# EAGLE board STM32F013C8T6-PCB (EAGLE 7.5.0)
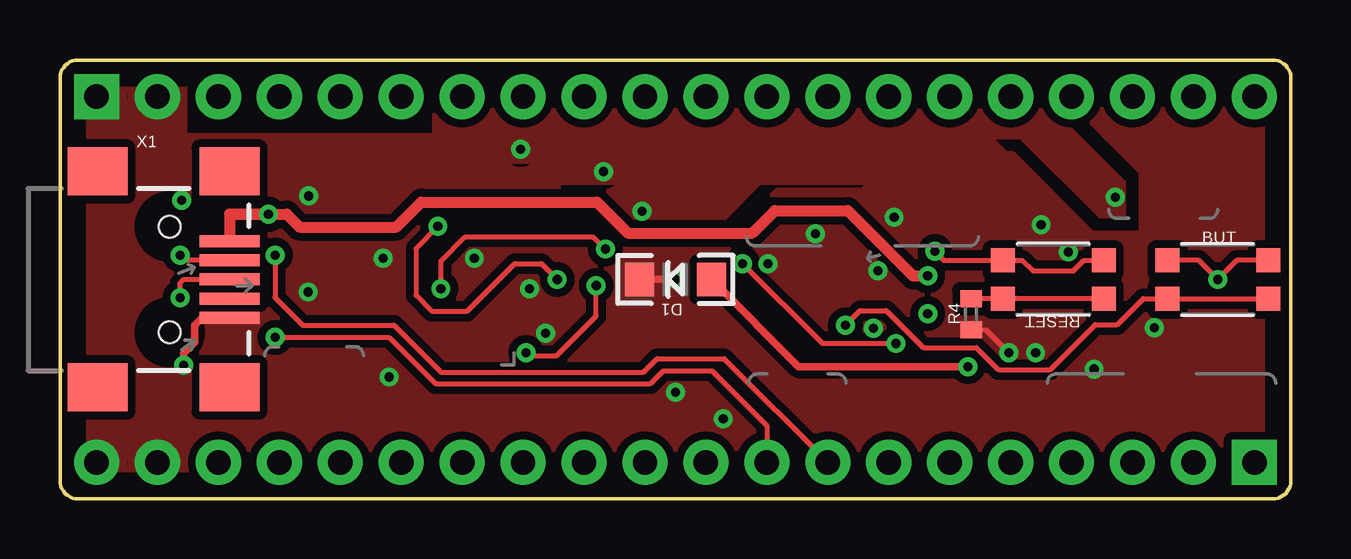
[diagram p0: board, top side]
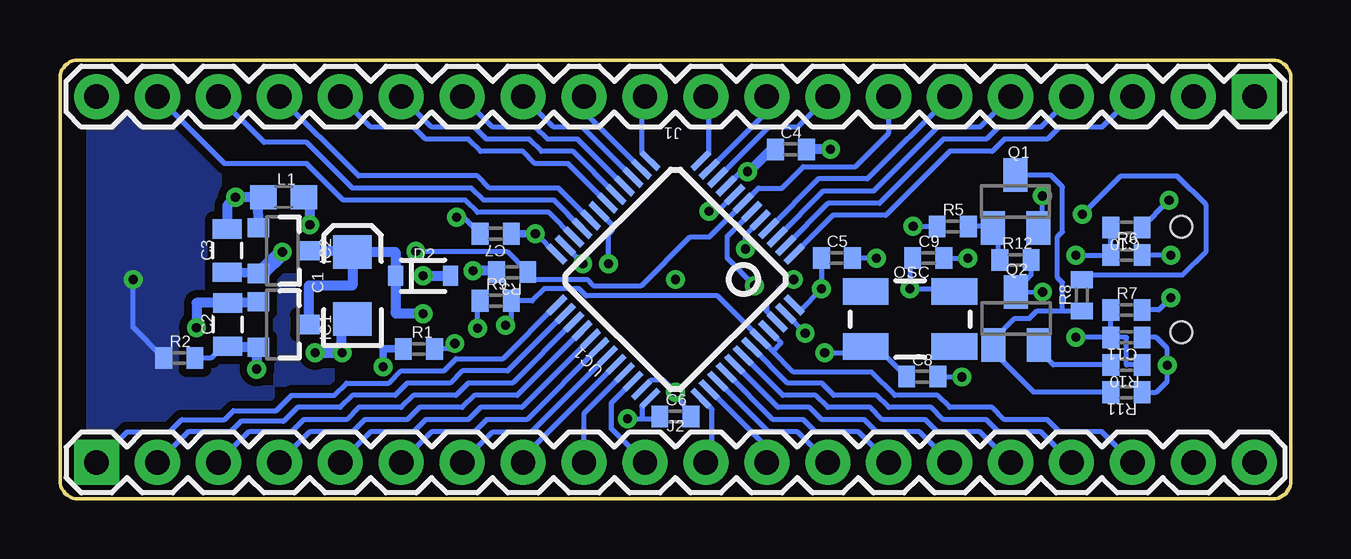
[diagram p1: board, bottom side, seen from below]

Size 51.31 x 18.29 mm. Coordinates in mm from the lower left corner, seen from the top.
Outline: 51.31,0.76 51.3,0.64 51.27,0.53 51.23,0.42 51.16,0.31 51.09,0.22 50.99,0.15 50.89,0.08 50.78,0.04 50.66,0.01 50.55,0 0.76,0 0.64,0.01 0.53,0.04 0.42,0.08 0.31,0.15 0.22,0.22 0.15,0.31 0.08,0.42 0.04,0.53 0.01,0.64 0,0.76 0,17.53 0.01,17.64 0.04,17.76 0.08,17.87 0.15,17.97 0.22,18.07 0.31,18.14 0.42,18.2 0.53,18.25 0.64,18.28 0.76,18.29 50.55,18.29 50.66,18.28 50.78,18.25 50.89,18.2 50.99,18.14 51.09,18.07 51.16,17.97 51.23,17.87 51.27,17.76 51.3,17.64 51.31,17.53 51.31,0.76
Outline: 51.31,0.76 51.31,0.76
Copper layers (1*16): Top 0.035mm / dielectric 1.5mm / Bottom 0.035mm
Design rules "default *": minimum track width 10mil, minimum drill 0.61mm, track to track 8mil, track to pad 8mil, pad to pad 8mil, via to via 8mil, smd to smd 8mil, copper to edge 40mil, drill to drill 8mil, minimum pad ring 0mil, minimum via ring 8mil, stop-mask expansion 2mil, vias tented up to drill 15mil, thermal gap 10mil
Net classes: 0 default: width 0.152 mm, clearance 0.152 mm, clearance 0.152 mm to class 1; 1 vcc: width 0.254 mm, clearance 0.152 mm, clearance 0.152 mm to class 0

## Footprints (pad centres in the part's own frame; a part is rotated, then mirrored left to right if it is on the bottom)
PUSHBUTTON-KMR241GLFS = smd 1 x 1: P$1 2.1,0.8; P$2 2.1,-0.8; P$3 -2.1,0.8; P$4 -2.1,-0.8
EIA3216 = smd 1.4 x 1.6: A 1.4,0; C -1.4,0
0805 = smd 0.8 x 1.2: 1 -0.9,0; 2 0.9,0
C0402 = smd 0.7 x 0.9: 1 -0.65,0; 2 0.65,0
LED-1206 = smd 1.2 x 1.4: A -1.5,0; C 1.5,0
SOD-323 = smd 0.63 x 0.83: 1 -1.15,0; 2 1.15,0
SOT23 = smd 0.8 x 0.9: 1 -0.95,-1; 2 0.95,-1; 3 0,1.1
1X20 = drill 1.016 pad 1.88 square: 1 0,0 | drill 1.016 pad 1.88: 2 2.54,0; 3 5.08,0; 4 7.62,0; 5 10.16,0; 6 12.7,0; 7 15.24,0; 8 17.78,0; 9 20.32,0; 10 22.86,0; 11 25.4,0; 12 27.94,0; 13 30.48,0; 14 33.02,0; 15 35.56,0; 16 38.1,0; 17 40.64,0; 18 43.18,0; 19 45.72,0; 20 48.26,0
0603 = smd 1.1 x 1: 1 -0.85,0; 2 0.85,0
CRYSTAL-SMD-5X3 = smd 1.9 x 1.1: 1 -1.85,-1.15; 2 1.85,-1.15; 3 1.85,1.15; 4 -1.85,1.15
SOT23_Q1 = smd 1 x 1.4: 1 -0.95,-1.1; 2 0.95,-1.1; 3 0,1.1
C0402_R4 = smd 0.7 x 0.9: 1 -0.65,0; 2 0.65,0
LQFP48 = smd 0.254 x 1: 1 -2.75,-4.25; 2 -2.25,-4.25; 3 -1.75,-4.25; 4 -1.25,-4.25; 5 -0.75,-4.25; 6 -0.25,-4.25; 7 0.25,-4.25; 8 0.75,-4.25; 9 1.25,-4.25; 10 1.75,-4.25; 11 2.25,-4.25; 12 2.75,-4.25; 25 2.75,4.25; 26 2.25,4.25; 27 1.75,4.25; 28 1.25,4.25; 29 0.75,4.25; 30 0.25,4.25; 31 -0.25,4.25; 32 -0.75,4.25; 33 -1.25,4.25; 34 -1.75,4.25; 35 -2.25,4.25; 36 -2.75,4.25 | smd 1 x 0.254: 13 4.25,-2.75; 14 4.25,-2.25; 15 4.25,-1.75; 16 4.25,-1.25; 17 4.25,-0.75; 18 4.25,-0.25; 19 4.25,0.25; 20 4.25,0.75; 21 4.25,1.25; 22 4.25,1.75; 23 4.25,2.25; 24 4.25,2.75; 37 -4.25,2.75; 38 -4.25,2.25; 39 -4.25,1.75; 40 -4.25,1.25; 41 -4.25,0.75; 42 -4.25,0.25; 43 -4.25,-0.25; 44 -4.25,-0.75; 45 -4.25,-1.25; 46 -4.25,-1.75; 47 -4.25,-2.25; 48 -4.25,-2.75
USB-MINIB = smd 2.5 x 0.5: D+ 2.5,0; D- 2.5,0.8; GND 2.5,-1.6; ID 2.5,-0.8; VBUS 2.5,1.6 | smd 2.5 x 2: GND.1 -3,-4.5; GND.2 -3,4.5; GND.3 2.5,4.5; GND.4 2.5,-4.5 | hole 0.9: 0,2.2; 0,-2.2

## Placement (x,y rotation side)
BUT  KMR211GLFS  [PUSHBUTTON-KMR241GLFS]  48.26,9.14 0 top
C1  100uF  [EIA3216]  39.12,8.89 90 bottom
C2  10uF  [0805]  44.32,7.26 90 bottom
C3  10uF  [0805]  44.34,10.35 90 bottom
C4  1uF  [C0402]  20.84,14.57 0 bottom
C5  1uF  [C0402]  18.92,10.03 0 bottom
C6  1uF  [C0402]  25.65,3.43 0 bottom
C7  1uF  [C0402]  33.15,11.05 180 bottom
C8  18pF  [C0402]  15.37,5.09 0 bottom
C9  18pF  [C0402]  15.11,10.03 0 bottom
C10  47pF  [C0402]  6.86,11.3 180 bottom
C11  47pF  [C0402]  6.86,6.73 180 bottom
D1  Blue  [LED-1206]  25.65,9.14 180 top
D2  SOD-323  [SOD-323]  36.17,9.3 0 bottom
IC1  MCP1703T-3302E/CB  [SOT23]  42.04,7.26 270 bottom
IC2  MCP1703T-3302E/CB  [SOT23]  42.04,10.34 270 bottom
J1  M20  [1X20]  1.52,16.76 180 bottom
J2  M20  [1X20]  49.78,1.52 0 bottom
L1  ferrite bead  [0603]  41.99,12.57 0 bottom
OSC  8MHz  [CRYSTAL-SMD-5X3]  15.88,7.49 0 bottom
Q1  NPN-BJT  [SOT23_Q1]  11.48,12.4 0 bottom
Q2  NPN-BJT  [SOT23_Q1]  11.46,7.52 0 bottom
R1  1k  [C0402]  36.35,6.25 0 bottom
R2  1k  [C0402]  46.33,5.87 0 bottom
R3  10k  [C0402]  32.46,9.45 180 bottom
R4  1k  [C0402_R4]  37.97,7.7 90 top
R5  1k  [C0402]  14.1,11.35 0 bottom
R6  22  [C0402]  6.86,10.16 0 bottom
R7  22  [C0402]  6.86,7.87 0 bottom
R8  10k  [C0402]  8.71,8.48 90 bottom
R9  10k  [C0402]  33.15,8.26 0 bottom
R10  1.5k  [C0402]  6.86,5.59 180 bottom
R11  36k  [C0402]  6.86,4.45 180 bottom
R12  47k  [C0402]  11.48,9.96 0 bottom
RESET  KMR211GLFS  [PUSHBUTTON-KMR241GLFS]  41.4,9.14 180 top
UC1  STM32F103CBT6  [LQFP48]  25.65,9.14 135 bottom
X1  USB-MINIB  [USB-MINIB]  4.57,9.14 0 top

## Library data of the parts
BUT C1-C11 D1 D2 IC1 IC2 J1 J2 L1 OSC Q1 Q2 R1-R12 RESET UC1 X1 = common

## Nets
0: J1.19 UC1.22
1: J1.18 UC1.21
2: J1.17 UC1.20
3: J1.16 UC1.18
4: J1.15 UC1.17
5: J1.14 UC1.16
6: J1.13 UC1.15
7: J1.12 UC1.14
8: J1.11 UC1.13
9: J1.10 UC1.12
10: J1.9 UC1.11
11: J1.8 UC1.10
12: J1.6 UC1.4
13: J1.5 UC1.3
14: J1.4 UC1.2
15: J2.17 UC1.43
16: J2.16 UC1.42
17: J2.15 UC1.41
18: J2.14 UC1.40
19: J2.13 UC1.39
20: J2.12 UC1.38
21: J2.11 UC1.37
22: J2.10 UC1.34
23_USBDP: C11.2 J2.9 R7.1 R10.1 UC1.33
24_USBDM: C10.2 J2.8 R6.1 UC1.32
25: J2.7 UC1.31
26: J2.6 UC1.30
27: J2.5 UC1.29
28: J2.4 UC1.28
29: J2.3 UC1.27
30: J2.2 UC1.26
31: J2.1 UC1.25
32: BUT.P$2 BUT.P$4 J2.18 R9.2 UC1.44 UC1.45
33: R1.2 UC1.19
+5V/2: D2.2 R8.2 X1.VBUS
AV+: C3.1 C4.1 IC2.2 J1.1 UC1.9
AV-: C3.2 C4.2 IC2.1 J1.2 L1.1 UC1.8
DGND: C1.C C2.2 C5.2 C6.2 C7.2 C8.2 C9.2 C10.1 C11.1 D1.C IC1.1 J2.19 L1.2 Q1.2 R4.1 R9.1 R11.1 UC1.23 UC1.35 UC1.47 X1.GND
DISC: R5.1 UC1.46
N$1: BUT.P$1 BUT.P$3 R2.1
N$2: D1.A R1.1
N$4: R4.2 RESET.P$1 RESET.P$3
N$51: Q2.2 R10.2
N$59: R6.2 X1.D-
N$60: R7.2 X1.D+
N$71: Q1.3 Q2.1 R8.1 R11.2
N$73: Q1.1 R5.2 R12.1
OSC_IN: C9.1 OSC.3 UC1.5
OSC_OUT: C8.1 OSC.1 UC1.6
RESET: J1.7 R3.1 RESET.P$2 RESET.P$4 UC1.7
VBAT: J1.3 UC1.1
VCC: C2.1 C5.1 C6.1 C7.1 IC1.2 J2.20 Q2.3 R2.2 R3.2 R12.2 UC1.24 UC1.36 UC1.48
VIN: C1.A D2.1 IC1.3 IC2.3 J1.20

## Tracks (layer width: path | path; a pad name or v marks a point on that pad's centre or on a via)
0
  Bottom 0.203: UC1.22 30.92,11.94 33.91,11.94 34.42,12.45 39.5,12.45 41.02,13.97 44.45,13.97 J1.19
1
  Bottom 0.203: UC1.21 30.72,12.45 33.66,12.45 34.16,12.95 39.12,12.95 41.02,14.86 42.8,14.86 J1.18
2
  Bottom 0.203: UC1.20 30.52,12.95 33.4,12.95 33.91,13.46 38.86,13.46 J1.17
3
  Bottom 0.203: UC1.18 30.13,13.97 31.5,13.97 32,14.48 33.78,14.48 34.29,14.99 36.07,14.99 36.58,15.49 38.35,15.49 J1.16
4
  Bottom 0.203: UC1.17 29.93,14.48 31.24,14.48 31.75,14.99 33.53,14.99 34.04,15.49 35.81,15.49 J1.15
5
  Bottom 0.203: UC1.16 29.73,14.99 30.99,14.99 31.5,15.49 33.27,15.49 J1.14
6
  Bottom 0.203: UC1.15 29.53,15.49 30.73,15.49 J1.13
7
  Bottom 0.203: UC1.14 29.46,16.14 J1.12
8
  Bottom 0.203: UC1.13 27.05,14.43 27.05,16.64 J1.11
9
  Bottom 0.203: UC1.12 24.26,14.43 24.26,16.64 J1.10
10
  Bottom 0.203: UC1.11 21.84,16.14 J1.9
11
  Bottom 0.203: J1.8 20.57,15.49 21.78,15.49 UC1.10
12
  Bottom 0.203: J1.6 17.65,13.34 19.7,13.34 UC1.4
13
  Bottom 0.203: J1.5 12.95,15.49 14.73,15.49 17.4,12.83 19.5,12.83 UC1.3
14
  Bottom 0.203: J1.4 10.41,15.49 12.19,15.49 12.7,14.99 14.48,14.99 17.14,12.32 19.3,12.32 UC1.2
15
  Bottom 0.203: J2.17 10.41,2.79 12.19,2.79 12.7,3.3 14.48,3.3 14.99,3.81 16.76,3.81 17.27,4.32 19.05,4.32 19.56,4.83 20.98,4.83 UC1.43
16
  Bottom 0.203: J2.16 12.95,2.79 14.73,2.79 15.24,3.3 17.02,3.3 17.53,3.81 19.3,3.81 19.81,4.32 21.18,4.32 UC1.42
17
  Bottom 0.203: J2.15 15.49,2.79 17.27,2.79 17.78,3.3 19.56,3.3 20.07,3.81 21.38,3.81 UC1.41
18
  Bottom 0.203: J2.14 18.03,2.79 19.81,2.79 20.32,3.3 21.58,3.3 UC1.40
19
  Bottom 0.203: J2.13 20.57,2.79 21.78,2.79 UC1.39
20
  Bottom 0.203: J2.12 21.84,2.15 UC1.38
21
  Bottom 0.203: J2.11 24.13,1.65 | 24.13,1.65 24.13,3.73 UC1.37 | J2.11 24.26,1.65 24.13,1.65 | 24.13,1.65 J2.11
22
  Bottom 0.203: J2.10 28.32,2.92 28.32,4 UC1.34
23_USBDP  (via drill 0.38 pad 0.69)
  Top 0.203: v8.97,6.73 13.72,6.73 15.65,4.8 24.61,4.8 25.15,5.33 27.18,5.33 29.46,3.05 J2.9
  Bottom 0.203: J2.9 29.46,3.57 UC1.33 | R10.1 6.86,5.59 6.86,6.73 C11.2 | C11.2 R7.1 | C11.2 v8.97,6.73
24_USBDM  (via drill 0.38 pad 0.69)
  Top 0.203: v8.97,10.16 8.97,8.38 10.11,7.24 13.92,7.24 15.88,5.28 24.33,5.28 24.89,5.84 27.69,5.84 J2.8
  Bottom 0.203: v8.97,10.16 R6.1 C10.2 | J2.8 32,1.73 UC1.32
25
  Bottom 0.203: J2.7 33.27,2.79 31.65,2.79 UC1.31
26
  Bottom 0.203: UC1.30 31.85,3.3 33.53,3.3 34.04,2.79 35.81,2.79 J2.6
27
  Bottom 0.203: UC1.29 32.05,3.81 33.78,3.81 34.29,3.3 36.07,3.3 36.58,2.79 38.35,2.79 J2.5
28
  Bottom 0.203: UC1.28 32.25,4.32 34.04,4.32 34.54,3.81 36.32,3.81 36.83,3.3 38.61,3.3 39.12,2.79 40.89,2.79 J2.4
29
  Bottom 0.203: UC1.27 32.45,4.83 34.29,4.83 34.8,4.32 36.58,4.32 37.08,3.81 38.86,3.81 39.37,3.3 41.15,3.3 41.66,2.79 43.43,2.79 J2.3
30
  Bottom 0.203: UC1.26 32.65,5.33 34.54,5.33 35.05,4.83 36.83,4.83 37.34,4.32 39.12,4.32 39.62,3.81 41.4,3.81 41.99,3.23 43.76,3.23 44.2,2.79 45.97,2.79 J2.2
31
  Bottom 0.203: J2.1 48.51,2.79 46.74,2.79 46.23,3.3 44.45,3.3 44.07,3.68 42.29,3.68 41.66,4.32 39.88,4.32 39.37,4.83 37.59,4.83 37.08,5.33 35.31,5.33 34.8,5.84 32.84,5.84 UC1.25
32  (via drill 0.38 pad 0.69)
  Top 0.203: v32.74,7.24 33.35,7.85 34.44,7.85 35.99,6.3 38.2,6.3 39.12,5.38 41.27,5.38 43.16,7.26 44.07,7.26 45.15,8.34 BUT.P$4 BUT.P$2
  Bottom 0.203: UC1.45 21.27,6.53 21.27,6.48 21.6,6.15 | 21.6,6.15 UC1.44 23.91,8.46 29.38,8.46 29.68,8.76 31.11,8.76 31.62,8.26 R9.2 32.5,7.48 v32.74,7.24 | J2.18 7.87,2.79 9.65,2.79 10.16,3.3 11.94,3.3 12.45,3.81 14.22,3.81 14.73,4.32 16.51,4.32 17.48,5.28 20.73,5.28 | 20.73,5.28 21.6,6.15
33  (via drill 0.38 pad 0.69)
  Top 0.203: v28.45,9.8 31.77,6.48 v34.85,6.48
  Bottom 0.203: v28.45,9.8 28.45,11.02 28.3,11.18 28.3,11.43 UC1.19 | v34.85,6.48 35.08,6.25 R1.2
+5V/2  (via drill 0.38 pad 0.69)
  Top 0.305: v36.17,9.3 36.12,9.28 | 36.12,9.28 36.13,9.27 v36.17,9.3 | v36.17,9.3 36.12,9.28 | 36.12,9.28 v36.17,9.3
  Top 0.457: v8.69,11.86 7.07,11.86 | 7.07,11.86 9.45,11.86 9.98,11.33 14.02,11.33 15.06,12.37 22.38,12.37 23.67,11.07 28.85,11.07 29.79,12.01 32.84,12.01 35.56,9.3 v36.17,9.3 | 7.07,11.86 X1.VBUS
  Bottom 0.203: v8.69,11.86 7.09,13.46 4.75,13.46 3.56,12.27 3.56,10.29 4.52,9.32 8.52,9.32 R8.2
  Bottom 0.406: v36.17,9.3 D2.2
AV+  (via drill 0.38 pad 0.69)
  Bottom 0.203: v22.66,13.64 22.93,13.64 UC1.9
  Bottom 0.406: IC2.2 42.9,9.42 | 42.9,9.42 IC2.2 | IC2.2 C3.1 | IC2.2 42.9,9.42 | C4.1 21.65,14.57 22.58,13.64 v22.66,13.64
  Bottom 0.66: 42.9,9.42 v42.04,10.29
  pour Top (isolate 0.33, rank 2): 0.13,18.16 0.13,13.21 37.9,13.21 41.58,9.53 42.8,9.53 42.8,11 38.23,15.57 38.23,18.16 15.62,18.16 15.62,15.11 5.21,15.11 5.21,18.16
AV-  (via drill 0.38 pad 0.69)
  Bottom 0.203: UC1.8 23.9,11.96 v24.26,11.99
  Bottom 0.406: v19.2,14.57 C4.2 | C3.2 44.34,12.23 v43.99,12.57 L1.1 | L1.1 43.05,12.45 | 43.05,12.45 42.96,12.45 L1.1 | IC2.1 43.05,12.45 | 43.05,12.45 L1.1
  pour Top (isolate 0.33, rank 2): 43.36,11.81 44.32,11.81 44.32,13.16 39.7,17.78 15.62,17.78 15.62,15.11 5.21,15.11 5.21,18.03 0.51,18.03 0.51,14.1 20.75,14.1 21.52,13.34 22.28,13.34 24.31,11.3 27.25,11.3 29.54,13.59 33.09,13.59 34.62,15.11 40.06,15.11
DGND  (via drill 0.38 pad 0.69)
  Top 0.203: R4.1 38.6,7.05 v39.55,6.1
  Top 0.305: v5.16,5.56 5.16,6.07 5.61,6.53 5.61,7.24 5.92,7.54 X1.GND | D1.C v25.65,9.14
  Bottom 0.203: v17.27,10.03 C5.2 | C8.2 v13.72,5.08 | C6.2 v25.65,4.45 26.16,4.95 26.66,4.95 UC1.35 | v33.91,7.11 33.91,8.4 | 33.91,8.4 R9.1 | C7.2 34.48,11.73 v34.77,11.73 | C9.2 v13.46,10.03 | C10.1 v5.08,12.45 | R11.1 5.61,4.45 5.16,4.9 v5.16,5.56 5.16,6.27 5.61,6.73 C11.1 | R9.1 33.91,8.4 | 33.91,8.4 R9.1 | v29.52,9.8 UC1.23 | Q1.2 10.36,11.46 v10.36,12.62 | v20.24,6.91 UC1.47
  Bottom 0.406: v40.66,6.1 v39.55,6.1 39.57,6.12 39.57,7.03 C1.C | v45.62,7.14 45.62,8.16 C2.2 43.09,8.16 IC1.1 | L1.2 40.89,12.33 v40.89,11.43
  pour Top (isolate 0.33, rank 2): 0.48,0.48 50.83,0.48 50.83,17.81 40.89,17.81 45.06,13.63 45.06,11.07 43.01,11.07 39.71,14.38 34.97,14.38 33.44,12.85 29.89,12.85 27.6,10.57 23.96,10.57 21.93,12.6 21.17,12.6 20.4,13.36 0.48,13.36
DISC  (via drill 0.38 pad 0.69)
  Top 0.203: v15.75,11.35 14.83,10.44 14.83,8.48 15.49,7.82 16.97,7.82 18.95,9.8 20.07,9.8 v20.73,9.14
  Bottom 0.203: v15.75,11.35 R5.1 | v20.73,9.14 20.93,9.14 21.87,8.2 21.87,7.83 UC1.46
N$1  (via drill 0.38 pad 0.69)
  Top 0.203: BUT.P$1 49.06,9.94 v48.26,9.14 47.46,9.94 BUT.P$3
  Bottom 0.203: R2.1 48.26,7.15 v48.26,9.14
N$1
  pour Bottom (isolate 0.33, no thermals): 0.44,17.46 0.44,0.45 50.86,0.57 50.61,17.46
N$2  (via drill 0.38 pad 0.69)
  Top 0.305: D1.A 30.79,5.51 v37.85,5.51
  Bottom 0.305: v37.85,5.51 37.85,6.25 R1.1
N$4
  Top 0.203: RESET.P$3 RESET.P$1 R4.2
N$51
  Bottom 0.203: R10.2 9.91,5.59 10.11,5.79 10.11,6.02 Q2.2 | Q2.2 10.24,6.71 Q2.2
N$59  (via drill 0.38 pad 0.69)
  Top 0.203: X1.D- 5.22,9.94 v5,10.16
  Bottom 0.203: v5,10.16 R6.2
N$60  (via drill 0.38 pad 0.69)
  Top 0.203: v5,8.38 5,8.99 5.16,9.14 X1.D+
  Bottom 0.203: v5,8.38 5.51,7.87 R7.2
N$71
  Bottom 0.203: R11.2 10.72,4.45 12.09,5.82 12.09,6.1 Q2.1 12.4,6.62 11.51,7.52 10.9,7.52 10.58,7.83 9.53,7.83 | 9.53,7.83 R8.1 | 9.53,7.83 9.53,9.02 9.73,9.22 9.73,10.92 9.53,11.12 9.53,13.01 10.02,13.49 Q1.3
N$73
  Bottom 0.203: R5.2 12.49,11.35 Q1.1 12.19,11.06 12.19,9.93 R12.1
OSC_IN  (via drill 0.38 pad 0.69)
  Top 0.203: v15.88,8.76 15.88,9.91 16.89,10.92 22.23,10.92 v22.73,10.41
  Bottom 0.203: v22.73,10.41 22.73,11 UC1.5 | OSC.3 13.69,8.81 | 13.69,8.81 13.69,8.64 OSC.3 | OSC.3 13.85,8.81 13.69,8.81 | 13.69,8.81 OSC.3 | OSC.3 14.61,8.64 14.73,8.76 v15.88,8.76 15.88,9.92 C9.1
OSC_OUT  (via drill 0.38 pad 0.69)
  Top 0.203: v19.43,6.1 19.56,5.97 20.7,5.97 22.35,7.62 v22.35,8.89
  Bottom 0.203: v19.43,6.1 17.97,6.1 OSC.1 17.27,6.34 C8.1 | v22.35,8.89 23.5,10.03 23.5,10.95 UC1.6
RESET  (via drill 0.38 pad 0.69)
  Top 0.203: v36.47,10.31 36.84,9.94 RESET.P$2 40.12,9.94 40.56,9.5 42.24,9.5 42.69,9.94 RESET.P$4
  Bottom 0.203: v36.47,10.31 32.67,10.31 R3.1 | J1.7 16.76,15.24 18.16,13.84 20.32,13.84 21.21,12.95 22.2,12.95 UC1.7 24.23,10.92 25.04,10.92 27.08,8.89 29.08,8.89 29.34,9.14 31.83,9.14 | R3.1 31.83,9.14 | R3.1 31.8,9.17 | 31.8,9.17 31.83,9.14 | 31.83,9.14 R3.1 | R3.1 31.8,9.17 | 31.8,9.17 R3.1
VBAT
  Bottom 0.203: J1.3 7.87,15.49 9.65,15.49 10.16,14.99 11.94,14.99 12.45,14.48 14.22,14.48 16.89,11.81 19.1,11.81 UC1.1
VCC  (via drill 0.38 pad 0.69)
  Bottom 0.203: R12.2 10.83,9.34 11.07,9.09 11.07,9 Q2.3 v10.35,8.62 | UC1.24 31.45,11.05 v31.5,11.05 | v27.65,3.34 27.05,3.34 | 27.05,3.34 26.39,3.34 C6.1 | C5.1 v19.57,8.75 20.47,7.85 UC1.48 | UC1.36 27.05,3.86 27.05,3.34 | C2.1 44.62,6.07 44.81,6.07 45.01,5.87 R2.2
  Bottom 0.305: v31.5,11.05 C7.1
  Bottom 0.406: v43.1,5.41 43.1,6.31 IC1.2 44.32,6.31 C2.1 | R3.2 33.16,9.5 v34.09,9.5
  pour Top (isolate 0.33, rank 2): 44.07,6.35 44.07,0.13 0.13,0.13 0.13,1.73 8.05,9.65 27.99,9.65 30.15,11.81 32.97,11.81 35.05,9.73 35.05,7.31 36.02,6.35
VIN  (via drill 0.38 pad 0.69)
  Bottom 0.406: C1.A 39.06,10.26 C1.A | v36.17,7.72 37.29,7.72 | 37.29,7.72 37.29,7.75 | 37.29,7.75 37.32,7.78 | 37.32,7.78 D2.1 37.32,10.29 C1.A | 37.32,7.78 37.29,7.75 | 37.29,7.75 37.31,7.72 37.29,7.72 | IC2.3 39.12,10.34 C1.A | C1.A 39.12,8.89 40.94,8.89 IC1.3

## Text on the board
tPlace: X1 | BUT | D1 | RESET | R4
bPlace: C4 | J1 | Q1 | L1 | R5 | C10 | R6 | C7 | IC2 | R12 | C9 | C5 | D2 | C3 | Q2 | OSC | R3 | R9 | C1 | R7 | R8 | IC1 | R1 | C2 | C11 | C8 | R2 | R10 | UC1 | R11 | C6 | J2
tDocu: av+ | av- | vbat | 14 | 13 | 12 | 11 | 10 | 9 | 8 | 7 | 6 | 5 | 4 | 3 | 2 | 1 | 0 | vin | pwm | pwm | pwm | pwm | pwm | pwm | pwm | tx3 | rx3 | max | ain | ain | ain | ain | ain | ain | ain | ain | ain | scl | sda | 5v | reset | boot1 | tx2 | rx2 | ss | sck | miso | mosi | i2c2 | spi1 | r3 | d1=33 | reset | but=32 | i2c1 | sda | scl | usb | rx1 | tx1 | spi2 | pwm | pwm | dp | dm | pwm | pwm | pwm | mosi | miso | sck | ss | vcc | gnd | but | 15 | 16 | 17 | 18 | 19 | 20 | 21 | 22 | 23 | 24 | 25 | 26 | 27 | 28 | 29 | 30 | 31